# Altium PCB LoRaSTM32_1.PcbDoc
Units mm, origin at the board's own origin, x right, y up, seen from the top; angles counter-clockwise.
Board outline 56.77 x 58.42 mm, 2 copper layers (Top Layer, Bottom Layer); 27 components, 29 nets, 134 pads, 52 vias.
Unrouted connection lines stored in the file: 45.
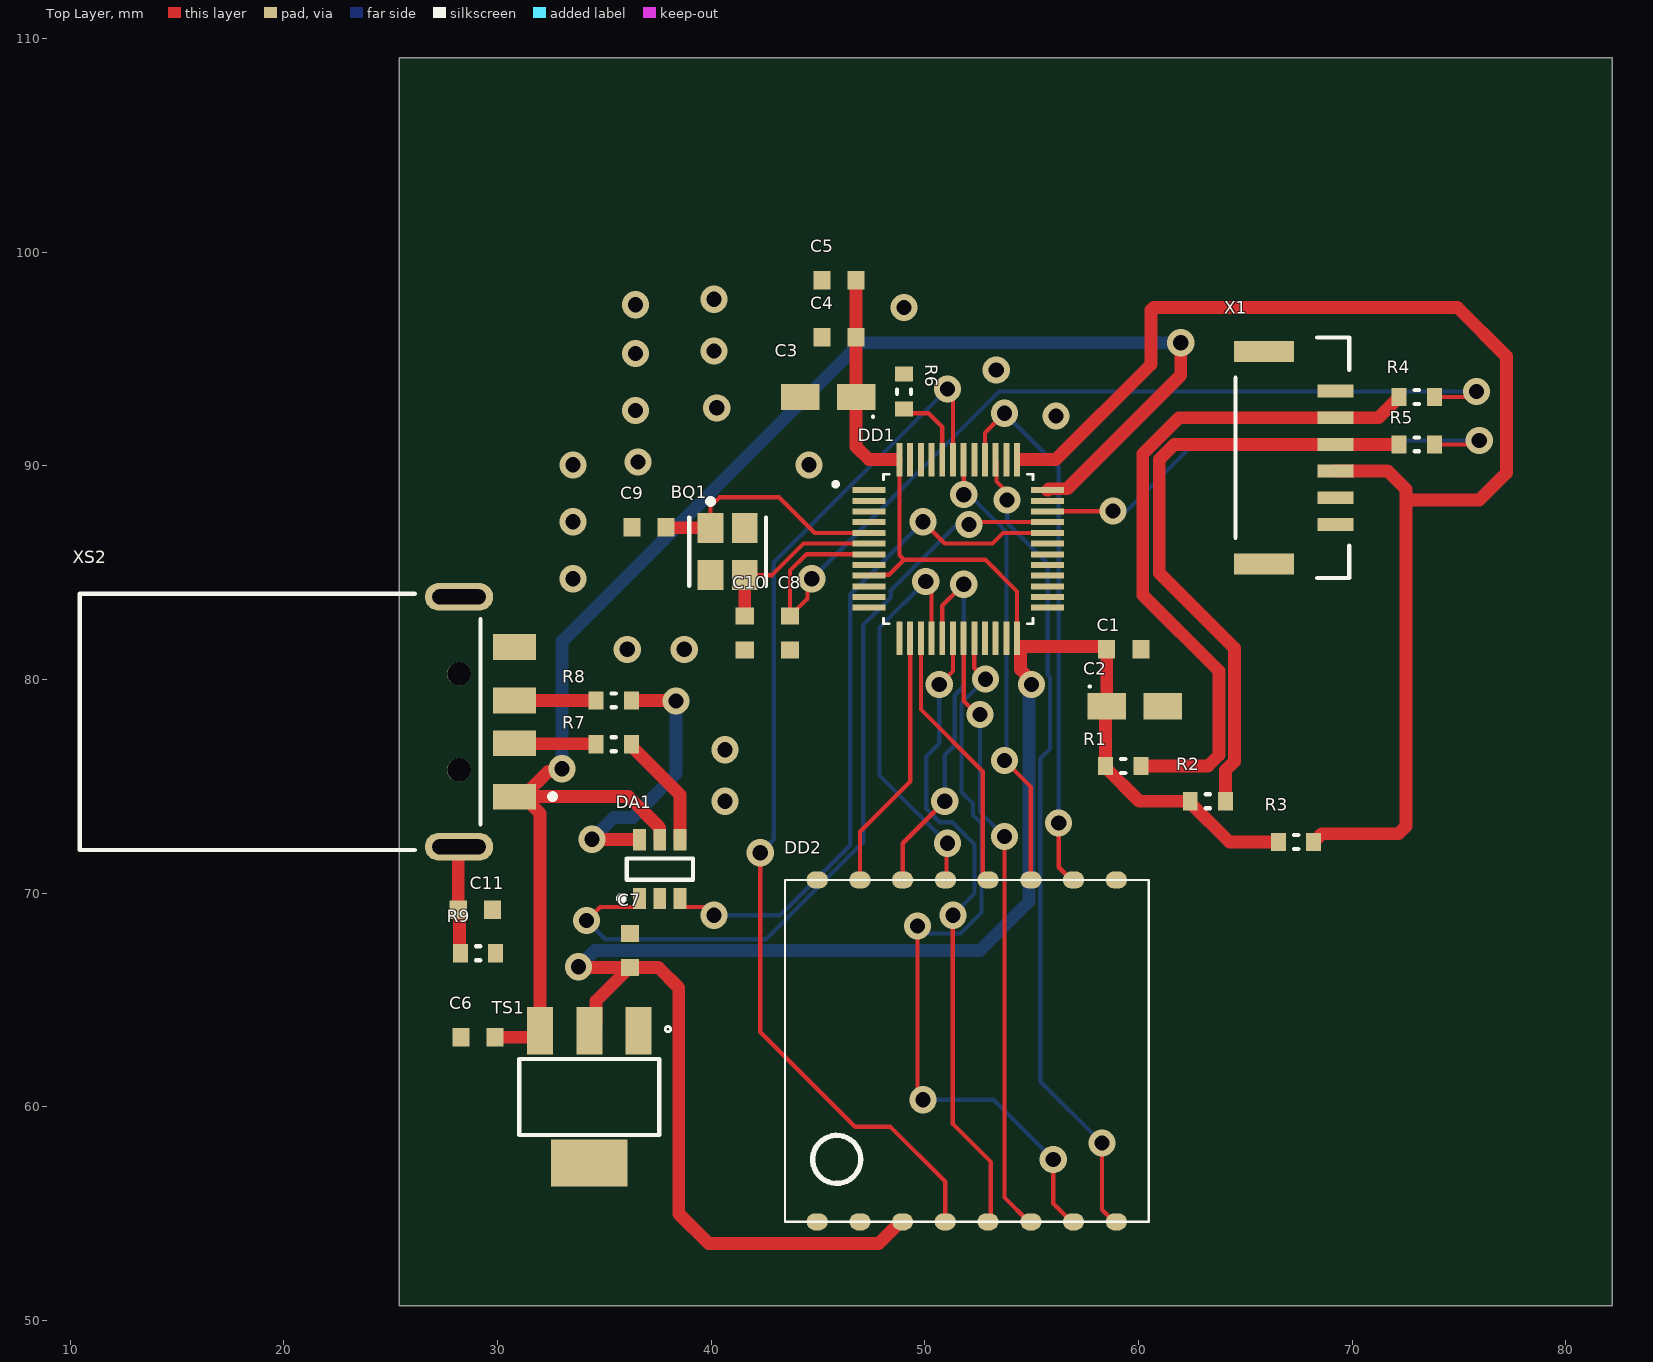
[diagram p0: Top Layer view]
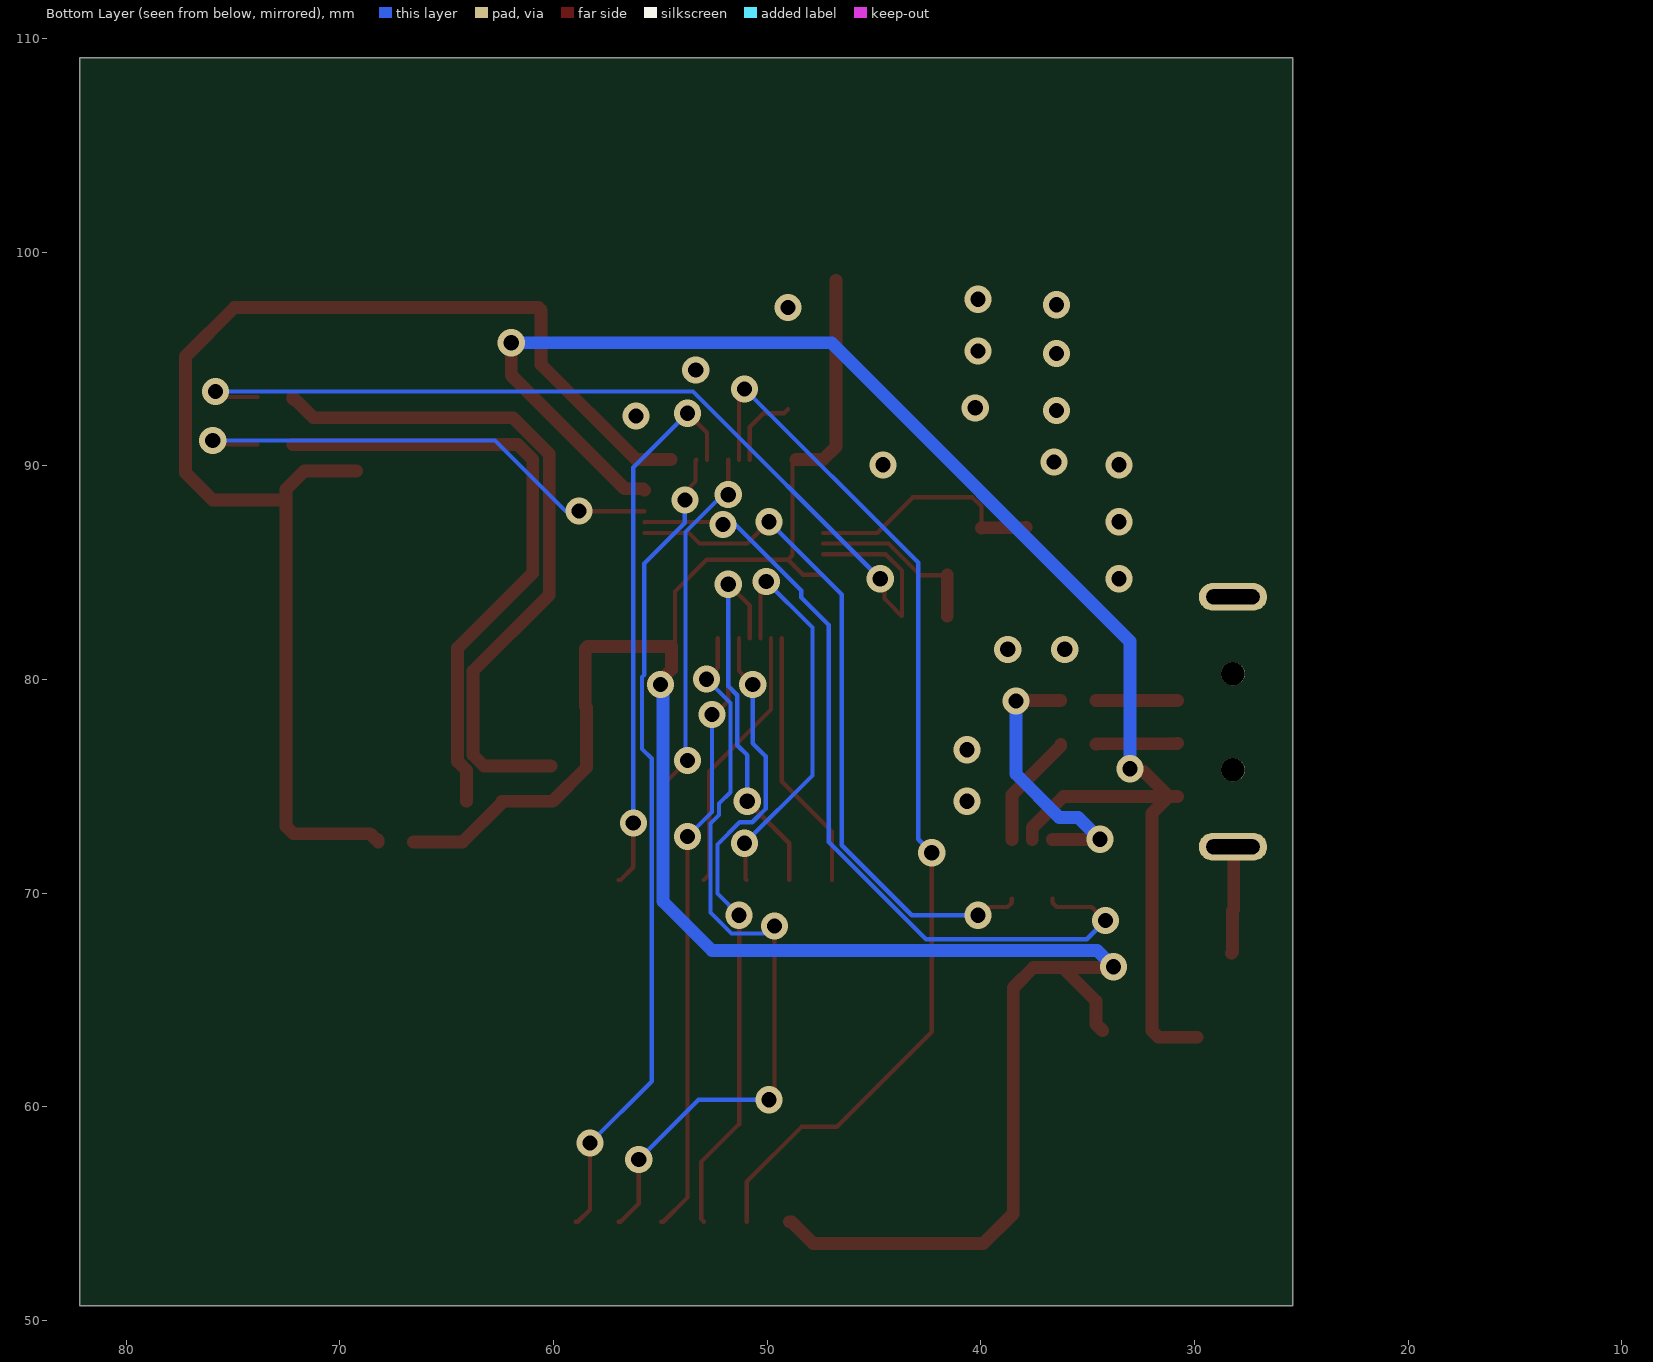
[diagram p1: Bottom Layer view, seen from below]
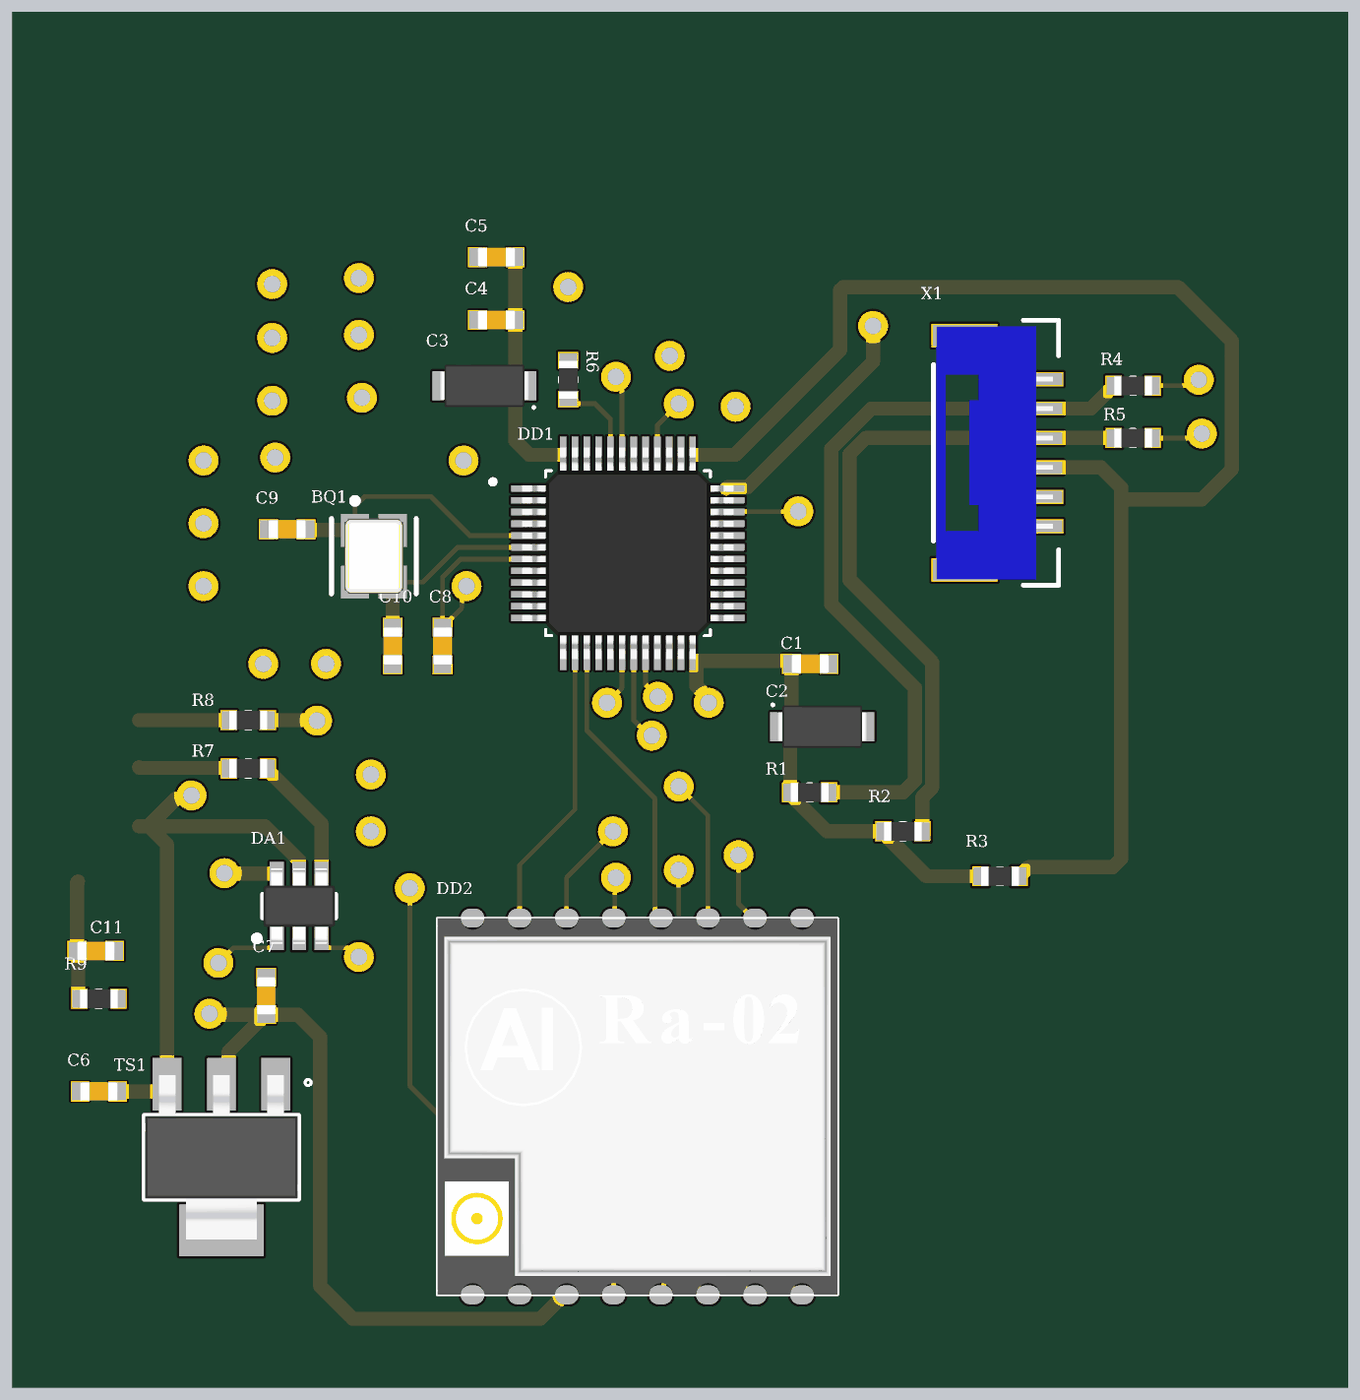
[diagram p2: 3D render of the assembled board from above, using the file's embedded part models]

## Layer stack, top to bottom
Top Solder: solder mask 0.0102, Solder Resist, Dk 3.5
Top Layer: signal copper 0.0356
Dielectric 1: dielectric 0.32, FR-4, Dk 4.8
Bottom Layer: signal copper 0.0356
Bottom Solder: solder mask 0.0102, Solder Resist, Dk 3.5

## Board outline
25.4,50.673 25.4,109.093 82.169,109.093 82.169,50.673

## Design rules (kind name [scope] priority, off if disabled: settings)
Clearance [All] p1: gap=0.125 ignorepadtopadclearanceinfootprint=FALSE except(0: Arc-Hole Track-Hole SMDPad-Hole THPad-Hole Via-Hole Fill-Hole Poly-Hole Region-Hole Text-Hole)
PolygonConnect [All] p1: connectstyle=Relief reliefconductorwidth=0.254 reliefentries=4 polygonreliefangle="90 Angle" airgapwidth=0.254
RoutingCorners [All] p1: cornerstyle=45-Degree minsetback=3 maxsetback=3
RoutingVias [All] p1: holewidth=0.3 width=0.7 viastyle="Through Hole" minholewidth=0.3 minwidth=0.6 maxholewidth=0.6 maxwidth=1.2
SolderMaskExpansion [All] p1: expansion=0.102
Width [All] p1: maxlimit=10 minlimit=0.125 preferedwidth=0.2
29 further rules are at their usual default settings.

## Components (designator, comment, footprint, x,y, rotation, side; value= is the part's Value field where it differs from the comment)
BQ1 "NX3225GA" NDK_NX3225GA_0 40.767,85.979 r270 top
C1 "*" CAPC1608X09L 59.309,81.407 r0 top
C2 "*" CAPMP3216X16N-A 59.819,78.74 r0 top value=1uF
C3 "*" CAPMP3216X16N-A 45.466,93.218 r180 top value=10uF
C4 "*" CAPC1608X09L 45.974,96.012 r180 top
C5 "*" CAPC1608X09L 45.974,98.679 r180 top
C6 "*" CAPC1608X09L 29.083,63.246 r180 top
C7 "*" CAPC1608X09L 36.195,67.31 r270 top
C8 "*" CAPC1608X09L 43.688,82.169 r90 top
C9 "*" CAPC1608X09L 37.084,87.122 r0 top
C10 "*" CAPC1608X09L 41.567,82.169 r90 top
C11 "*" CAPC1608X09L 28.956,69.215 r180 top value=4.7n
DA1 "USBLC6-2SC6" SOT95P280X145-6N 37.592,71.12 r90 top
DD1 "STM32L073CZT6" *QFP50P900X900X160-48N 51.562,86.106 r0 top
DD2 "RA-02 SX1278" RA-02 43.459,54.61 r90 top
R1 "R1608" RESC1608X05N 59.284,75.946 r0 top value=10k
R2 "R1608" RESC1608X05N 63.246,74.295 r0 top value=10k
R3 "R1608" RESC1608X05N 67.373,72.39 r0 top value=10k
R4 "R1608" RESC1608X05N 73.025,93.218 r180 top value=22
R5 "R1608" RESC1608X05N 73.025,90.999 r180 top value=22
R6 "R1608" RESC1608X05N 49.022,93.472 r270 top value=22
R7 "R1608" RESC1608X05N 35.433,76.962 r180 top value=22
R8 "R1608" RESC1608X05N 35.433,79.014 r180 top value=22
R9 "R1608" RESC1608X05N 29.083,67.183 r180 top value=22
TS1 "LD1117S33CTR" *SOT223 34.29,60.452 r270 top
X1 "BM06B-GHS-TBT(LF)(SN)(N)" BM06B-GH 67.54,90.374 r270 top
XS2 "Conn_Molex_0480372200_eec" Molex_0480372200_0 19.819,78.014 r270 top

## Footprints (in the part's own frame and the unit in brackets; to place one, negate y for a bottom-side part, rotate by r counter-clockwise, add the part's x,y. Pads: shape width x height; smd on the part's side, far side on the other; paste and mask are expansions set on the pad)
*QFP50P900X900X160-48N [mm]
  rect 1.56x0.28 smd: 1(-4.18,2.75) 2(-4.18,2.25) 3(-4.18,1.75) 4(-4.18,1.25) 5(-4.18,0.75) 6(-4.18,0.25) 7(-4.18,-0.25) 8(-4.18,-0.75) 9(-4.18,-1.25) 10(-4.18,-1.75) 11(-4.18,-2.25) 12(-4.18,-2.75) 25(4.18,-2.75) 26(4.18,-2.25) 27(4.18,-1.75) 28(4.18,-1.25) 29(4.18,-0.75) 30(4.18,-0.25) 31(4.18,0.25) 32(4.18,0.75) 33(4.18,1.25) 34(4.18,1.75) 35(4.18,2.25) 36(4.18,2.75)
  rect 0.28x1.56 smd: 13(-2.75,-4.18) 14(-2.25,-4.18) 15(-1.75,-4.18) 16(-1.25,-4.18) 17(-0.75,-4.18) 18(-0.25,-4.18) 19(0.25,-4.18) 20(0.75,-4.18) 21(1.25,-4.18) 22(1.75,-4.18) 23(2.25,-4.18) 24(2.75,-4.18) 37(2.75,4.18) 38(2.25,4.18) 39(1.75,4.18) 40(1.25,4.18) 41(0.75,4.18) 42(0.25,4.18) 43(-0.25,4.18) 44(-0.75,4.18) 45(-1.25,4.18) 46(-1.75,4.18) 47(-2.25,4.18) 48(-2.75,4.18)
  silkscreen extent -5.84,-3.5 3.5,3.5, body extent -4.5,-4.5 4.5,4.5, height 1.6
*SOT223 [mil]
  rect 88x48 smd: 1(-122,91) 2(-122,0) 3(-122,-91)
  rect 86.61x141.73 smd: 4(122.01,0)
  silkscreen extent -130,-129 70,150, body extent -138,-128 138,128, height 67
BM06B-GH [mm]
  rect 1x2.8 smd paste-0.05: 0(-4.975,-1.675) 0(4.975,-1.675)
  rect 0.6x1.7 smd paste-0.05: 1(-3.125,1.675) 2(-1.875,1.675) 3(-0.625,1.675) 4(0.625,1.675) 5(1.875,1.675) 6(3.125,1.675)
  silkscreen extent -5.63,-3 5.63,2.32, body extent -5.38,-2.87 5.37,2.08, height 4.18
CAPC1608X09L [mm] "Chip Capacitor, 2-Leads, Body 1.60x0.80mm, IPC High Density"
  rect 0.8x0.85 smd paste-0.05 mask+0.07: 1(-0.8,0) 2(0.8,0)
  body extent -0.8,-0.4 0.8,0.4, height 0.9
CAPMP3216X16N-A [mm] "Molded Capacitor, 2-Leads, Body 3.20x1.60mm, IPC Medium Density"
  rect 1.8x1.23 smd: 1(-1.31,0) 2(1.31,0)
  silkscreen extent -2.15,0.88 -2.05,0.97, body extent -1.92,-0.9 1.92,0.9, height 1.6
Molex_0480372200_0 [mm]
  rect 1.2x2 smd paste+0 mask+0: 1(3.5,10.975) 2(1,10.975) 3(-1,10.975) 4(-3.5,10.975)
  oval 1.3x3.2 hole 2.5 slot 0.7 at 0 deg paste-1000 mask+0: 5(-5.85,8.375) 6(5.85,8.375)
  round 1.1 hole 1.1 unplated paste-1000 mask+0: ""(-2.25,8.375) ""(2.25,8.375)
  silkscreen extent -6,-9.38 6,12.88, body extent -6.02,-9.32 6.03,11.63, height 2.11
NDK_NX3225GA_0 [mm]
  rect 1.4x1.2 smd paste+0 mask+0: 1(-1.1,-0.8) 2(1.1,-0.8) 3(1.1,0.8) 4(-1.1,0.8)
  silkscreen extent -2.47,-1.8 1.6,1.8, body extent -1.6,-1.25 1.6,1.25, height 0.6
RA-02 [mm]
  oval 0.8x1 smd: 1(0,-1.5) 2(0,-3.5) 3(0,-5.5) 4(0,-7.493) 5(0,-9.5) 6(0,-11.5) 7(0,-13.5) 8(0,-15.5) 9(16,-15.5) 10(16,-13.5) 11(16,-11.5) 12(16,-9.5) 13(16,-7.5) 14(16,-5.5) 15(16,-3.5) 16(16,-1.5)
  silkscreen extent 0,-17.02 16,0, body extent 0,-17.01 16,-0.01, height 3.2
RESC1608X05N [mm] "Chip Resistor, 2-Leads, Body 1.60x0.80mm, IPC Medium Density"
  rect 0.7x0.85 smd paste-0.05: 1(-0.825,0) 2(0.825,0)
  silkscreen extent -0.1,-0.33 0.1,0.33, body extent -0.8,-0.4 0.8,0.4, height 0.45
SOT95P280X145-6N [mm] "SOT23, 6-Leads, Body 2.92x2.80mm, Pitch 0.95mm, IPC Medium Density"
  rect 1x0.6 smd: 1(-1.375,0.95) 2(-1.375,0) 3(-1.375,-0.95) 4(1.375,-0.95) 5(1.375,0) 6(1.375,0.95)
  silkscreen extent -1.5,-1.55 0.5,1.92, body extent -1.6,-1.53 1.6,1.53, height 1.45

## Part data
BQ1: library part NX3225GA-25MHZ, "NX3225GA-25MHZ 8pF, 25 МГц, 30/20ppm, 8пФ, -40...+85°C, SMD 3.2*2.5*0.75мм, Кварцевый резонатор", Package="SMD-4 NDK America, Inc.", Availability=Unavailable, ComponentLink1Description=buy, ComponentLink1URL=https://www.chipdip.ru/product0/9000523947, ComponentLink2Description=datasheet, ComponentLink2URL=https://static.chipdip.ru/lib/014/DOC004014815.pdf, MF="NDK America, Inc.", MP="NX3225GA-25MHZ 8pF", Price=None, SnapEDA_Link=https://www.snapeda.com/parts/NX2520SA-24.000000MHZ-B8/NDK%20America%2C%20Inc./view-part/?ref=snap
C1 C4 C5 C6 C7 C8 C9 C10 C11: library part CC1608, "Конденсатор 1.6x0.8 мм", Tolerance=±10%, ТКЕ=X7R
  C1 C4 C5 C8: GRM21BR71C105KA01L=100nF, РКД Наименование="CC1608M - NP0 - 16 V - 10 nF ±10%"
  C6: GRM21BR71C105KA01L=100n, РКД Наименование="CC1608M - NP0 - 16 V - 10 nF ±10%"
  C7: GRM21BR71C105KA01L=10u, РКД Наименование="CC1608M - NP0 - 16 V - 10 nF ±10%"
  C9 C10: GRM1885C1H240JA01D=24pF, РКД Наименование="CC1608M - NP0 - 16 V - 10 nF ±10%"
  C11: РКД Наименование="CC1608M - NP0 - 16 V - 4.7 nF ±10%"
C2 C3: library part CT3216-A, "Tantalum Surface Mount Capacitor, Size A", Voltage=6.3V
DA1: "USB protection IC", Breakdown Voltage=6V, Capacitance=3.5pF, Case/Package=SOT-23, Clamping Voltage=17V, Leakage Current=150nA, Manufacturer=STMicroelectronics, Max Operating Temperature=125°C, Min Operating Temperature=-40°C, Operating Supply Voltage=1.1V, Package Quantity=3000, Peak Pulse Current=5A, Power Line Protection=Yes, Reverse Standoff Voltage=5.25V, Supplier Part Number 1=497-5235-1-ND, Test Current=1mA, Working Voltage=5V, ComponentLink1Description=http://www.farnell.com/datasheets/1690354.pdf, ComponentLink1URL=http://www.farnell.com/datasheets/1690354.pdf, ComponentLink2Description=http://www.st.com/content/ccc/resource/technical/document/datasheet/06/1d/48/9c/6c/20/4a/b2/CD00050750.pdf/files/CD00050750.pdf/jcr:content/translations/en.CD00050750.pdf, ComponentLink2URL=http://www.st.com/content/ccc/resource/technical/document/datasheet/06/1d/48/9c/6c/20/4a/b2/CD00050750.pdf/files/CD00050750.pdf/jcr:content/translations/en.CD00050750.pdf, ComponentLink3Description=http://www.st.com/web/en/resource/technical/document/datasheet/CD00050750.pdf, ComponentLink3URL=http://www.st.com/web/en/resource/technical/document/datasheet/CD00050750.pdf, ComponentLink4Description=http://datasheet.iiic.cc/stmicroelectronics/USBLC6-2SC6.pdf, ComponentLink4URL=http://datasheet.iiic.cc/stmicroelectronics/USBLC6-2SC6.pdf, ComponentLink5Description=http://www.produktinfo.conrad.com/datenblaetter/1100000-1199999/001184109-da-01-en-IC_ESD_PROTECTI_USBLC6_2SC6_SOT_23_6_STM.pdf, ComponentLink5URL=http://www.produktinfo.conrad.com/datenblaetter/1100000-1199999/001184109-da-01-en-IC_ESD_PROTECTI_USBLC6_2SC6_SOT_23_6_STM.pdf, Contact Plating=Matte,Tin, Data Rate=480Mbps, Depth=1.75mm, Direction=Bidirectional,Unidirectional, Element Configuration=Dual, ESD Protection=Yes, Height=1.3mm, Lead Free="Lead Free", Length=3.05mm, Manufacturer Part Number=USBLC6-2SC6, Max Breakdown Voltage=6V, Max Reverse Leakage Current=150nA, Min Breakdown Voltage=6V, Mount="Surface Mount", Number of Bidirectional Channels=2, Number of Channels=2, Number of Elements=1, Number of Pins=6, Packaging="Tape and Reel", PartNo=USBLC6-2SC6, Polarity=Bidirectional,Unidirectional, Pricing 1="1=0.49, 10=0.419, 100=0.3131, 500=0.24602, 1000=0.1901 (USD)", Radiation Hardening=No, REACH SVHC="No SVHC", Reverse Breakdown Voltage=6V, Stock 1=165611, Supplier 1=Digi-Key, Termination=SMD/SMT, Width=1.75mm
DD1: "ARM® Cortex®-M0+ STM32 L0 Microcontroller IC 32-Bit 32MHz 192KB _192K x 8_ FLASH 48-LQFP", Package="LQFP-48 STMicroelectronics", Digi-Key_Part_Number=497-17506-ND, Digi-Key_Purchase_URL=https://www.digikey.com/product-detail/en/stmicroelectronics/STM32L073CZT6/497-17506-ND/8024098?utm_source=snapeda&utm_medium=aggregator&utm_campaign=symbol, MF=STMicroelectronics, MP=STM32L073CZT6, SnapEDA_Link=https://www.snapeda.com/parts/STM32L073CZT6/STMicroelectronics/view-part/?ref=snap
DD2: library part RA-02
R1 R2 R3 R4 R5 R6 R7 R8 R9: "Резистор 1.6x0.8 мм", Tolerance=±1%, РКД Наименование="RC1608M - 22 Ohm ±1%"
TS1: "Linear Regulator / LDO Regulator Pos 3.3V 1.3A 4-Pin(3+Tab) SOT-223 T/R", Code_IPC=SOT-223, ComponentLink1Description=buy, ComponentLink1URL=https://www.chipdip.ru/product/ld1117s33ctr-2, ComponentLink2Description=datasheet, ComponentLink2URL=https://static.chipdip.ru/lib/292/DOC000292513.pdf, DatasheetVersion="revB, Feb-2007", PackageDescription="3-Lead Plastic Small Outline Transistor (TT) [SOT-23]", PackageReference=SOT-223, PackageVersion="revBB, Aug-2009", PartNumber=LD1117S33CTR
X1: library part "Разъем SWD", "SWD отладка", Colour=Natural, Contact Resistance=50mR, Housing Colour=Beige, Manufacturer=JST, Max Current Rating=1A, Max Operating Temperature=85°C, Max Voltage Rating (AC)=50V, Min Operating Temperature=-25°C, Supplier Part Number 1=455-1582-1-ND, ComponentLink1Description=http://www.jst-mfg.com/product/pdf/eng/eGH.pdf, ComponentLink1URL=http://www.jst-mfg.com/product/pdf/eng/eGH.pdf, Connector Type="Outer Shroud Contact", Contact Material=Bronze, Contact Plating=Copper,Tin, Depth=4.25mm, Fastening Type=Ramp, Housing Material=Polyamide, Lead Free="Lead Free", Length=10.75mm, Manufacturer Part Number=BM06B-GHS-TBT(LF)(SN)(N), Mount="Surface Mount", Number of Positions=6, Number of Rows=1, Orientation=Straight, Packaging="Tape and Reel", PartNo=BM06B-GHS-TBT(LF)(SN)(N), Pitch=0.049inch, Pricing 1="1=0.56, 10=0.524, 100=0.4019, 500=0.34948, 1000=0.28832 (USD)", Stock 1=44065, Supplier 1=Digi-Key, Termination=Solder
XS2: "CONN PLUG USB A 4POS SMD R/A", Current - Maximum per Contact=1.5A, Digikey Part Number=WM3983CT-ND, Manufacturer=Molex, Mouser Part Number=538-48037-2200, Package=CONN_USB_12MM0_18MM75, Part Number=0480372200, Temperature="-20°C to +85°C", Temperature Range High=+85°C, Temperature Range Low=-20°C, Voltage - Maximum="150V AC (RMS)", ComponentLink1Description=Upverter, ComponentLink1URL=https://upverter.com/upn/revision/6bade1e906f93a88/, ComponentLink2Description=Datasheet, ComponentLink2URL=http://www.molex.com/pdm_docs/sd/480372200_sd.pdf, Digikey Description="CONN PLUG USB A 4POS SMD R/A", helpURL=https://upverter.com/upn/revision/6bade1e906f93a88/, Is Female=yes, Lead Free=yes, Price=0.972849437621, RoHS=TRUE, Supplier 1=Digi-Key, Supplier 2=Mouser, Supplier Part Number 1=WM3983CT-ND, Supplier Part Number 2=538-48037-2200

## Via types
v1: diameter 1.27, hole 0.711, Top Layer to Bottom Layer, 52 vias

## Nets (pads, with @x,y where several pads share a name; then routed paths per layer and width w, separated by ;. In a path a pad name is that pad's centre, name@x,y a point inside that pad or via, vN(x,y) a via of type N, cw(c..) or ccw(c..) an arc to the next point about the centre after c; other vN are vias at no path point)
D+: DA1.1 DD1.33 | length 39.2
  Top Layer w0.2: v1(34.163,68.707) 34.801,69.345 36.442,69.345 36.642,69.545 DA1.1 ; v1(52.07,87.249) 52.187,87.366 55.732,87.366 DD1.33
  Bottom Layer w0.2: v1(34.163,68.707) 35.035,67.835 42.562,67.835 47.117,72.39 47.117,82.55 48.399,83.832 48.399,84.16 51.489,87.249 v1(52.07,87.249)
D-: DA1.3 DD1.32 | length 32.6
  Top Layer w0.2: DA1.3 38.542,69.545 38.742,69.345 39.748,69.345 v1(40.132,68.961) ; v1(49.911,87.376) 50.927,86.36 53.159,86.36 53.655,86.856 DD1.32
  Bottom Layer w0.2: v1(40.132,68.961) 43.228,68.961 46.506,72.239 46.506,83.971 v1@49.784,87.249
GND: BQ1.2 BQ1.4 C1.2 C2.2 C3.2 C4.2 C5.2 C6.2 C7.1 C8.1 C9.1 C10.1 C11.1 DA1.2 DD1.8 DD1.23 DD1.35 DD1.47 DD2.1 DD2.2 DD2.9 DD2.16 R6.1 R9.1 TS1.1 X1.5 XS2.4
  other v1: 40.64,74.295 40.64,76.708 36.068,81.407 38.735,81.407 33.528,84.709 33.528,87.376 33.528,90.043 44.577,90.043 36.576,90.17 56.134,92.329 36.449,92.583 40.259,92.71 53.34,94.488 36.449,95.25 40.132,95.377 49.022,97.409 36.449,97.536 40.132,97.79
MISO: DD1.16 DD2.13 | length 19
  Top Layer w0.2: v1(50.038,84.582) 50.312,84.308 DD1.16 ; DD2.13 51.007,70.658 51.007,72.279 v1(51.054,72.326)
  Bottom Layer w0.2: v1(50.038,84.582) 47.879,82.423 47.879,75.501 v1(51.054,72.326)
MOSI: DD1.17 DD2.14 | length 17.8
  Top Layer w0.2: DD2.14 48.959,72.327 v1(50.927,74.295) ; DD1.17@50.8,81.938 DD1.17 50.812,83.451 v1@51.689,84.328
  Bottom Layer w0.2: v1(50.927,74.295) 50.927,76.454 51.393,76.92 51.393,79.26 51.816,79.683 v1(51.816,84.455)
NetBQ1_1: BQ1.1 C9.2 DD1.5 | length 11.4
  Top Layer w0.2: BQ1.1 39.967,88.1 40.386,88.519 43.18,88.519 44.843,86.856 DD1.5
  Top Layer w0.6: C9.2 37.906,87.1 39.946,87.1 BQ1.1
NetBQ1_3: BQ1.3 C10.2 DD1.6 | length 8.3
  Top Layer w0.2: BQ1.3 42.842,84.879 44.319,86.356 DD1.6
  Top Layer w0.6: C10.2 BQ1.3
NetC8_2: C8.2 DD1.7 R4.1 | length 45.1
  Top Layer w0.2: v1(44.704,84.709) 44.499,84.504 44.499,83.78 44.013,83.294 44.013,83.269 43.713,82.969 C8.2 43.688,85.09 44.454,85.856 DD1.7 ; R4.1 75.565,93.218 v1(75.819,93.472)
  Bottom Layer w0.2: v1(44.704,84.709) 53.467,93.472 v1(75.819,93.472)
NetC11_2: C11.2 R9.2 XS2.5 XS2.6 | length 5
  Top Layer w0.6: XS2.6 28.156,72.126 C11.2 28.208,69.163 28.208,67.233 R9.2
NetDD1_18: DD1.18 DD2.5 | length 30.3
  Top Layer w0.2: v1(50.673,79.756) 51.312,80.395 DD1.18 ; v1(51.308,68.961) 51.308,59.182 53.086,57.404 53.086,54.737 DD2.5
  Bottom Layer w0.2: v1(50.673,79.756) 50.673,77.006 50.067,76.4 50.067,73.939 50.695,73.311 51.286,73.311 52.324,72.273 52.324,69.977 v1(51.308,68.961)
NetDD1_19: DD1.19 DD2.6 | length 28.6
  Top Layer w0.2: DD1.19 51.812,78.998 v1@52.451,78.359 ; v1(53.721,72.644) 53.721,55.748 54.859,54.61 DD2.6
  Bottom Layer w0.2: v1(52.578,78.359) 52.578,73.787 v1(53.721,72.644)
NetDD1_20: DD1.20 DD2.7 | length 36.1
  Top Layer w0.2: v1(49.657,68.453) 49.657,60.579 v1(49.911,60.325) ; DD1.20 52.312,80.53 v1(52.832,80.01) ; v1(56.007,57.531) 56.007,55.462 56.859,54.61 DD2.7
  Bottom Layer w0.2: v1@49.784,68.199 49.882,68.101 51.664,68.101 52.649,69.086 52.649,73.256 52.253,73.652 52.253,74.185 51.718,74.72 51.718,78.896 v1(52.832,80.01) ; v1(49.911,60.325) 53.213,60.325 v1(56.007,57.531)
NetDD1_34: DD1.34 R5.1 | length 23.8
  Top Layer w0.2: DD1.34 55.756,87.87 58.787,87.87 v1(58.801,87.884) ; R5.1 75.759,90.999 v1(75.946,91.186)
  Bottom Layer w0.2: v1(58.801,87.884) 59.436,87.884 62.738,91.186 v1(75.946,91.186)
NetDD1_37: DD1.37 R3.2 X1.4 | length 62.9
  Top Layer w0.2: DD1.37 DD1.37@54.323,90.297 ; 60.579,97.292 60.696,97.409
  Top Layer w0.6: 54.494,90.286 56.123,90.286 60.579,94.742 60.579,97.292 ; 60.696,97.409 74.93,97.409 77.216,95.123 77.216,89.662 75.946,88.392 72.517,88.392 ; R3.2 68.198,72.465 68.248,72.515 68.323,72.515 68.579,72.771 72.166,72.771 72.517,73.122 72.517,88.392 ; X1.4 71.668,89.749 72.517,88.9 72.517,88.392
NetDD1_39: DD1.39 DD2.8 | length 38.2
  Top Layer w0.2: DD1.39 53.352,90.246 53.352,89.269 v1@53.975,88.646 ; v1(58.293,58.293) 58.293,55.176 58.859,54.61 DD2.8
  Bottom Layer w0.2: v1(53.848,88.392) 53.848,87.328 55.753,85.423 55.753,80.21 55.851,80.112 55.851,76.742 55.401,76.292 55.401,61.185 v1(58.293,58.293)
NetDD1_40: DD1.40 DD2.10 | length 25.8
  Top Layer w0.2: DD1.40 52.812,91.547 v1(53.721,92.456) ; v1(56.261,73.279) 56.261,71.208 56.859,70.61 DD2.10
  Bottom Layer w0.2: v1(53.721,92.456) 56.261,89.916 v1(56.261,73.279)
NetDD1_42: DD1.42 DD2.11 | length 21.2
  Top Layer w0.2: DD1.42 51.814,90.284 51.814,88.648 v1(51.816,88.646) ; v1(53.721,76.2) 54.959,74.962 DD2.11
  Bottom Layer w0.2: v1(51.816,88.646) 52.07,88.646 53.819,86.897 53.819,76.298 v1(53.721,76.2)
NetDD1_43: DD1.43 DD2.4 | length 50.6
  Top Layer w0.2: v1(42.291,71.882) 42.291,63.5 46.736,59.055 48.387,59.055 50.952,56.49 DD2.4 ; v1(51.054,93.599) 51.312,93.341 DD1.43
  Bottom Layer w0.2: v1(42.291,71.882) 42.926,72.517 42.926,85.471 v1(51.054,93.599)
NetDD1_44: DD1.44 R6.2 | length 3.7
  Top Layer w0.2: R6.2 49.213,92.456 50.165,92.456 50.812,91.809 DD1.44
NetR1_2: R1.2 R4.2 X1.2 | length 32.6
  Top Layer w0.6: R1.2 63.246,75.946 63.759,76.459 63.759,80.386 60.198,83.947 60.198,90.551 61.896,92.249 X1.2 71.231,92.249 72.075,93.093 72.15,93.093 72.2,93.143 R4.2
NetR2_2: R2.2 R5.2 X1.3 | length 29.2
  Top Layer w0.6: R2.2 64.071,75.746 64.484,76.159 64.484,81.471 60.969,84.986 60.969,90.297 61.671,90.999 X1.3 R5.2
NetR7_2: R7.2 XS2.2 | length 3.8
  Top Layer w0.6: XS2.2 30.82,76.988 34.582,76.988 R7.2
NetR8_2: R8.2 XS2.3 | length 3.8
  Top Layer w0.6: XS2.3 R8.2
NSS: DD1.14 DD2.15 | length 12.3
  Top Layer w0.2: DD2.15 46.959,72.867 49.312,75.22 DD1.14
SCK: DD1.15 DD2.12 | length 12.6
  Top Layer w0.2: DD1.15 49.812,78.585 52.705,75.692 52.705,70.864 DD2.12
USB1_N: DA1.4 R7.1 | length 5.4
  Top Layer w0.6: R7.1 36.258,76.887 38.542,74.603 DA1.4
USB1_P: DA1.6 R8.1 | length 13
  Top Layer w0.6: v1(34.417,72.517) 34.428,72.506 36.642,72.506 DA1.6 ; R8.1 38.334,79.014 v1(38.354,78.994)
  Bottom Layer w0.6: v1(34.417,72.517) 35.433,73.533 36.322,73.533 38.354,75.565 v1(38.354,78.994)
V3.3: C1.1 C2.1 C3.1 C4.1 C5.1 C7.2 DD1.9 DD1.24 DD1.48 DD2.3 R1.1 R2.1 R3.1 TS1.2 | length 109.6
  Top Layer w0.2: DD1.9 47.422,84.896 48.32,84.896 49.022,85.598 ; DD1.48 48.812,85.808 49.022,85.598 ; DD1.24@54.312,81.747 DD1.24 54.312,84.118 52.832,85.598 49.022,85.598
  Top Layer w0.6: v1(33.782,66.548) 33.82,66.51 C7.2@36.17,66.51 ; TS1.2 34.6,63.86 34.6,64.94 C7.2@36.17,66.51 ; C5.1 C4.1 46.774,93.22 C3.1 46.776,90.892 47.382,90.286 48.652,90.286 ; DD2.3 48.859,54.61 47.843,53.594 39.878,53.594 38.481,54.991 38.481,65.562 37.533,66.51 C7.2 C7.2@36.17,66.51 ; v1(54.991,79.756) 54.991,79.937 54.472,80.456 54.472,81.532 58.409,81.532 58.509,81.432 C1.1 C2.1 58.459,78.69 R1.1 58.459,75.871 60.035,74.295 R2.1 62.421,74.22 64.251,72.39 R3.1
  Bottom Layer w0.6: v1(33.782,66.548) 34.544,67.31 52.578,67.31 54.876,69.608 54.876,79.641 v1(54.991,79.756)
VBUS: C6.1 DA1.5 DD1.36 TS1.3 XS2.1 | length 74.5
  Top Layer w0.6: C6.1 31.674,63.246 TS1.3 31.979,73.729 XS2.1@31.194,74.514 ; XS2.1 XS2.1@31.194,74.514 ; v1(33.02,75.819) 32.892,75.691 32.371,75.691 XS2.1@31.194,74.514 ; DA1.5 37.592,73.052 36.13,74.514 XS2.1@31.194,74.514 ; DD1.36 55.807,88.921 56.663,88.921 61.976,94.234 v1(61.976,95.758)
  Bottom Layer w0.6: v1(33.02,75.819) 33.02,81.788 46.99,95.758 v1(61.976,95.758)
pads on no net: DD1.1 DD1.2 DD1.3 DD1.4 DD1.10 DD1.11 DD1.12 DD1.13 DD1.21 DD1.22 DD1.25 DD1.26 DD1.27 DD1.28 DD1.29 DD1.30 DD1.31 DD1.38 DD1.41 DD1.45 DD1.46 TS1.4 X1.0 X1.1 X1.6 XS2.

## Silkscreen, mask and mechanical layers (free items; w line width, h text height)
Mechanical 1:
  the board outline again, w0.254